# Altium PCB imp_match_v1_1.PcbDoc
Units mil, origin at the board's own origin, x right, y up, seen from the top; angles counter-clockwise.
Board outline 3937.01 x 3937.01 mil, 4 copper layers (Top Layer, Layer 1, Layer 2, Bottom Layer), stack 26.182 mil thick; 15 components, 12 nets, 75 pads, 910 vias.
Unrouted connection lines stored in the file: 23.
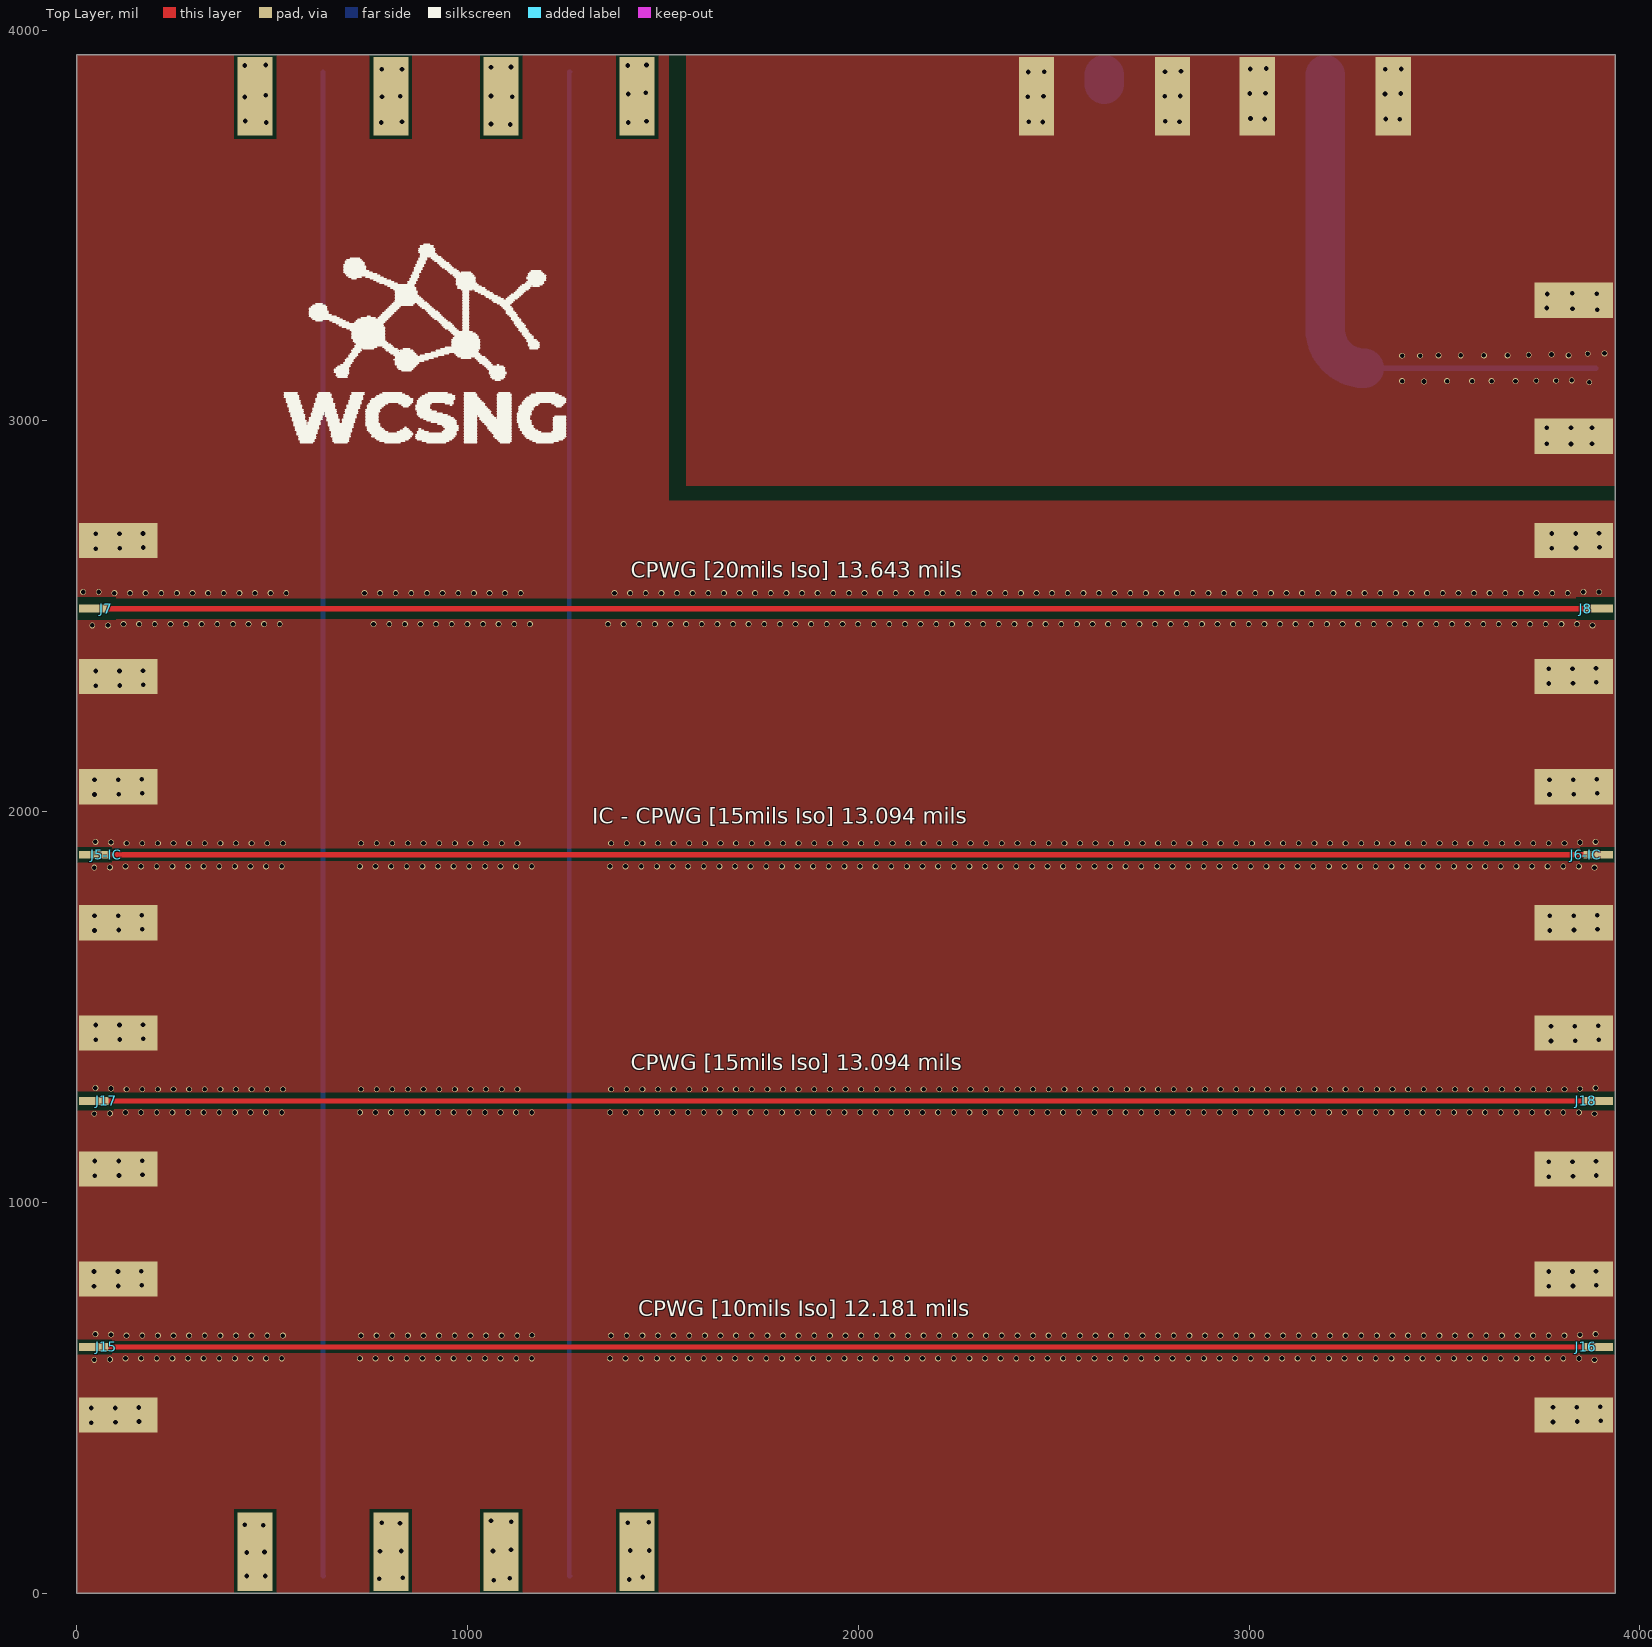
[diagram p0: Top Layer view]
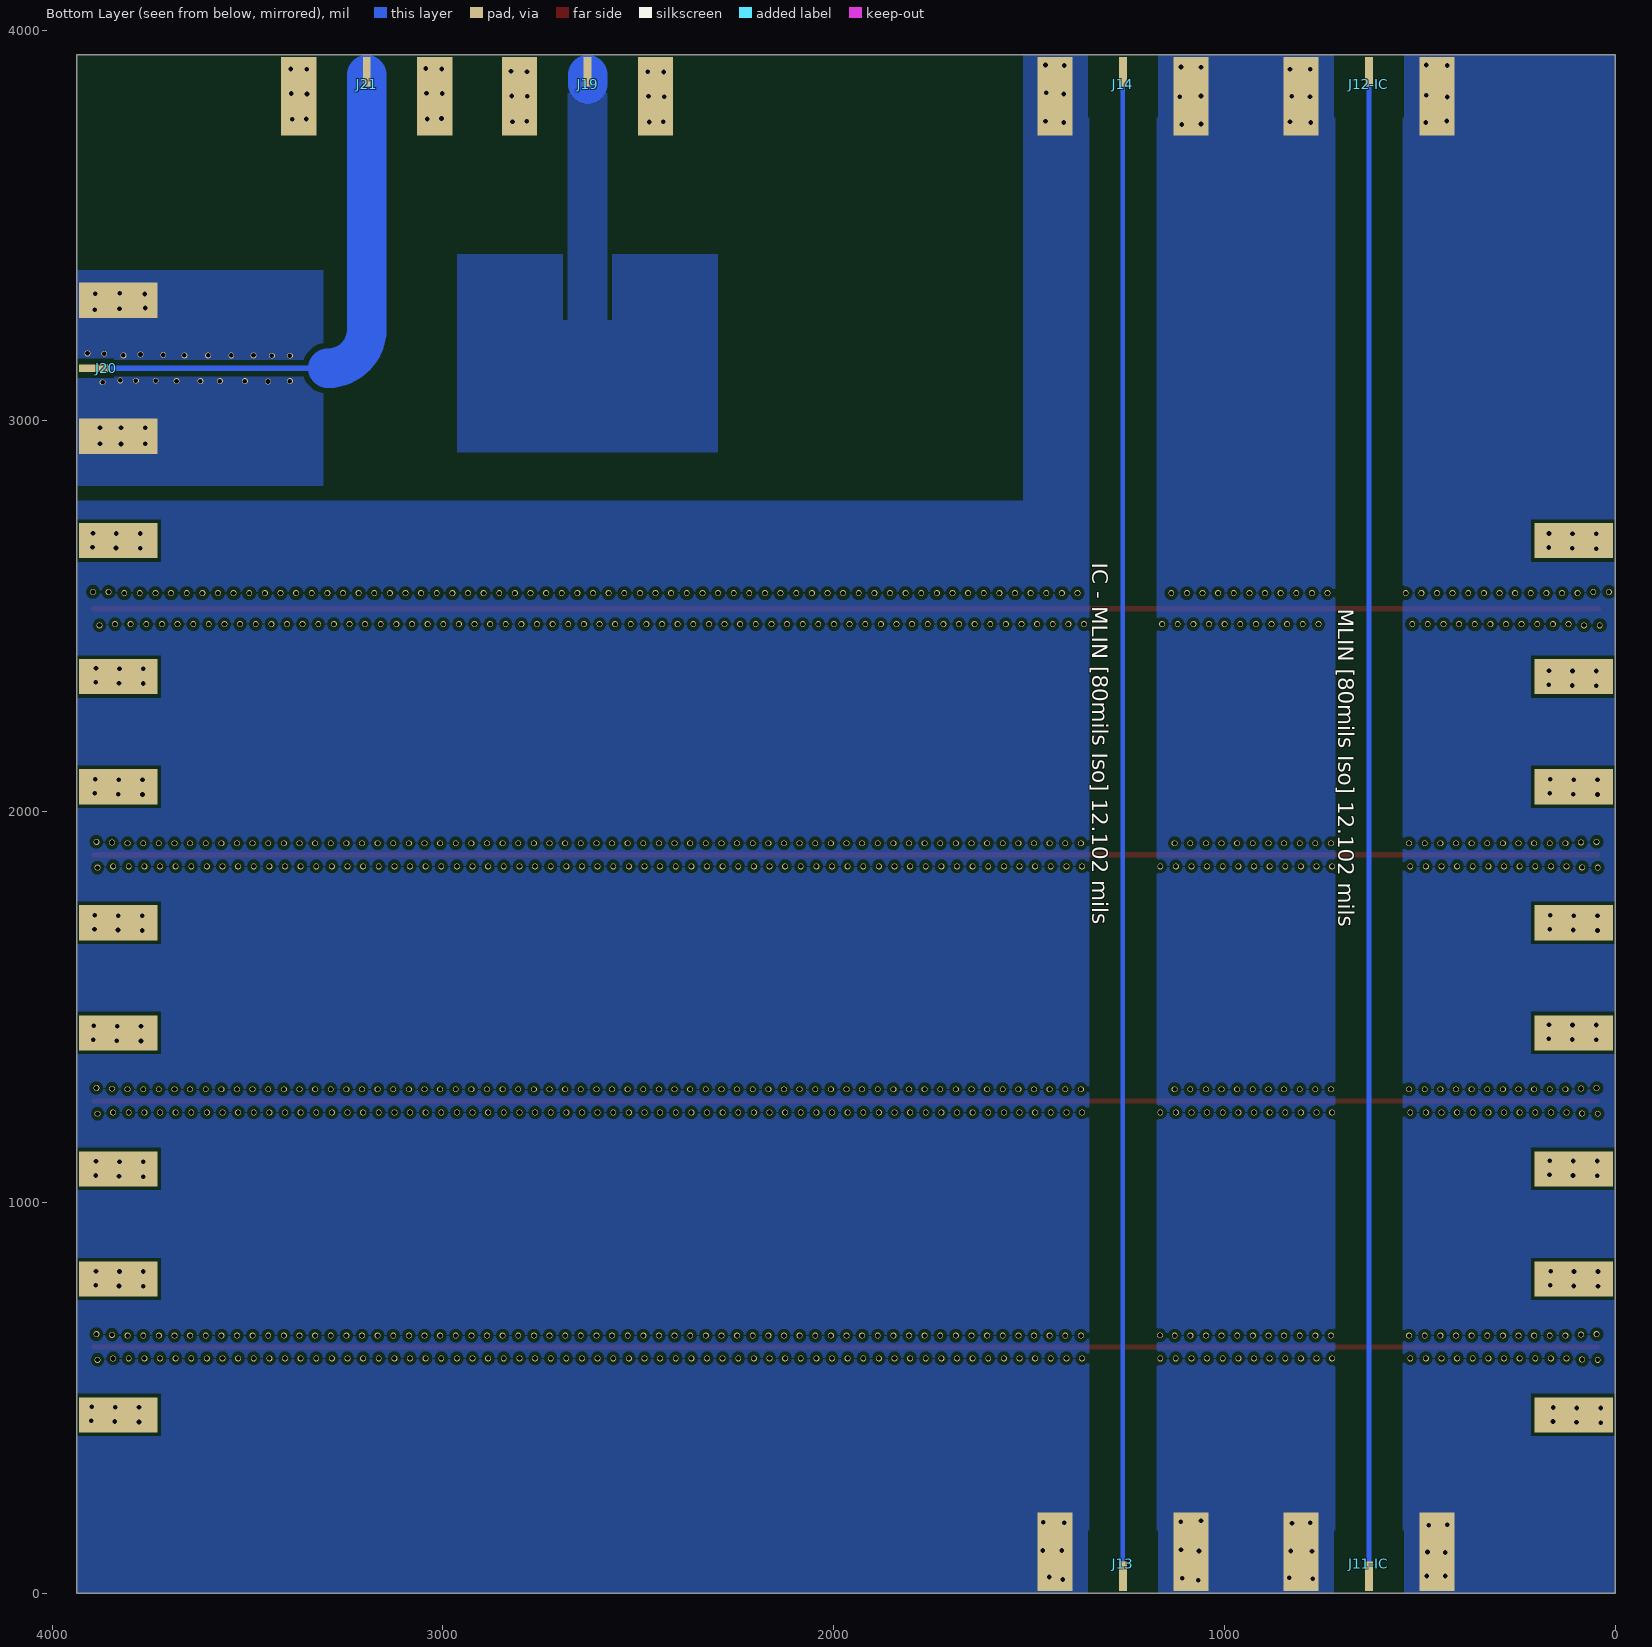
[diagram p1: Bottom Layer view, seen from below]
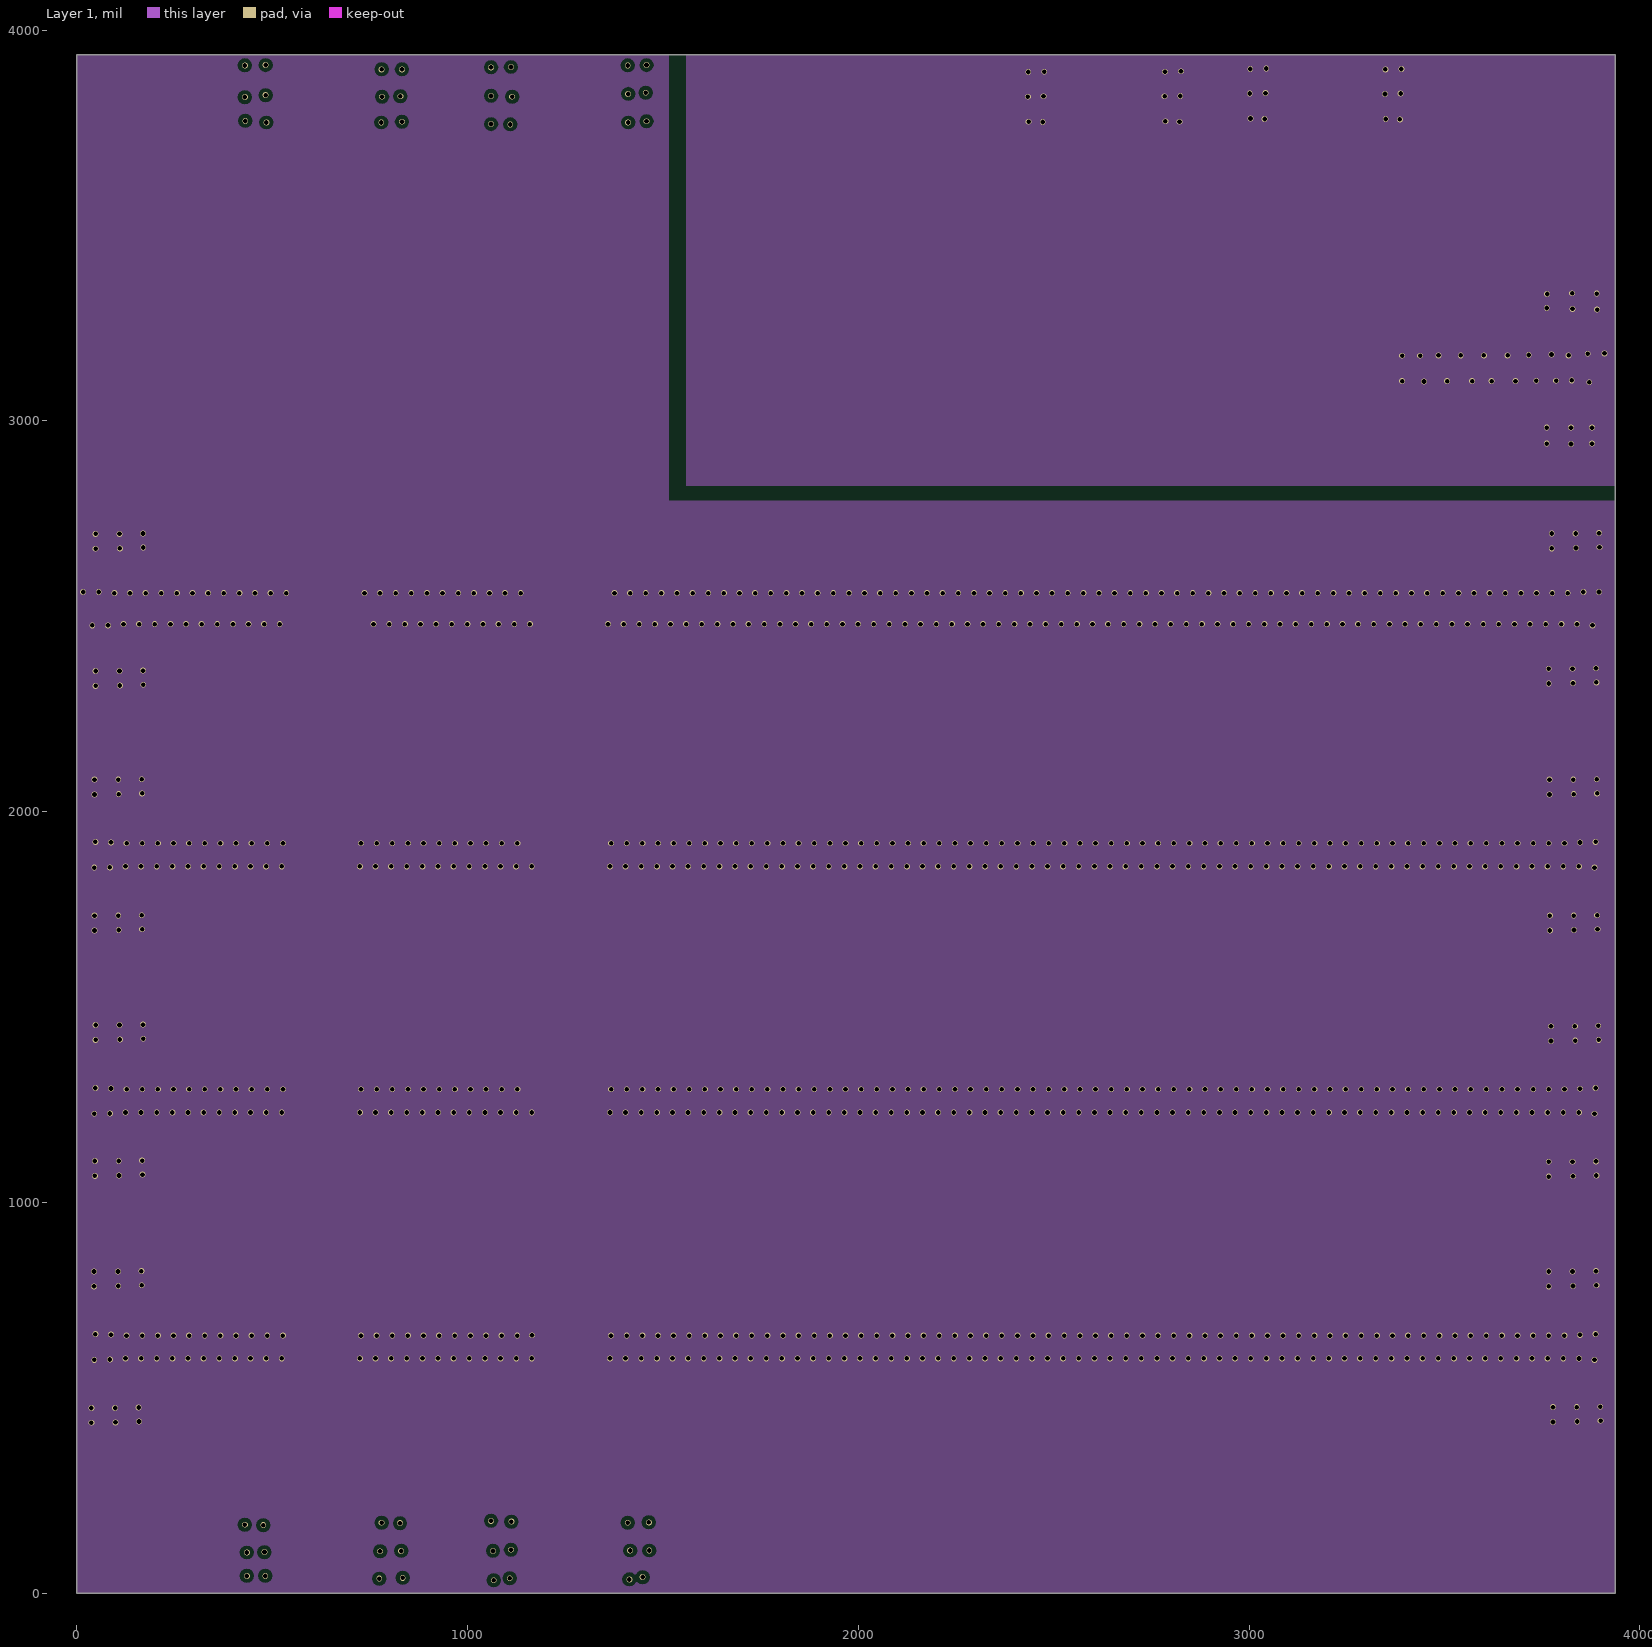
[diagram p2: Layer 1]
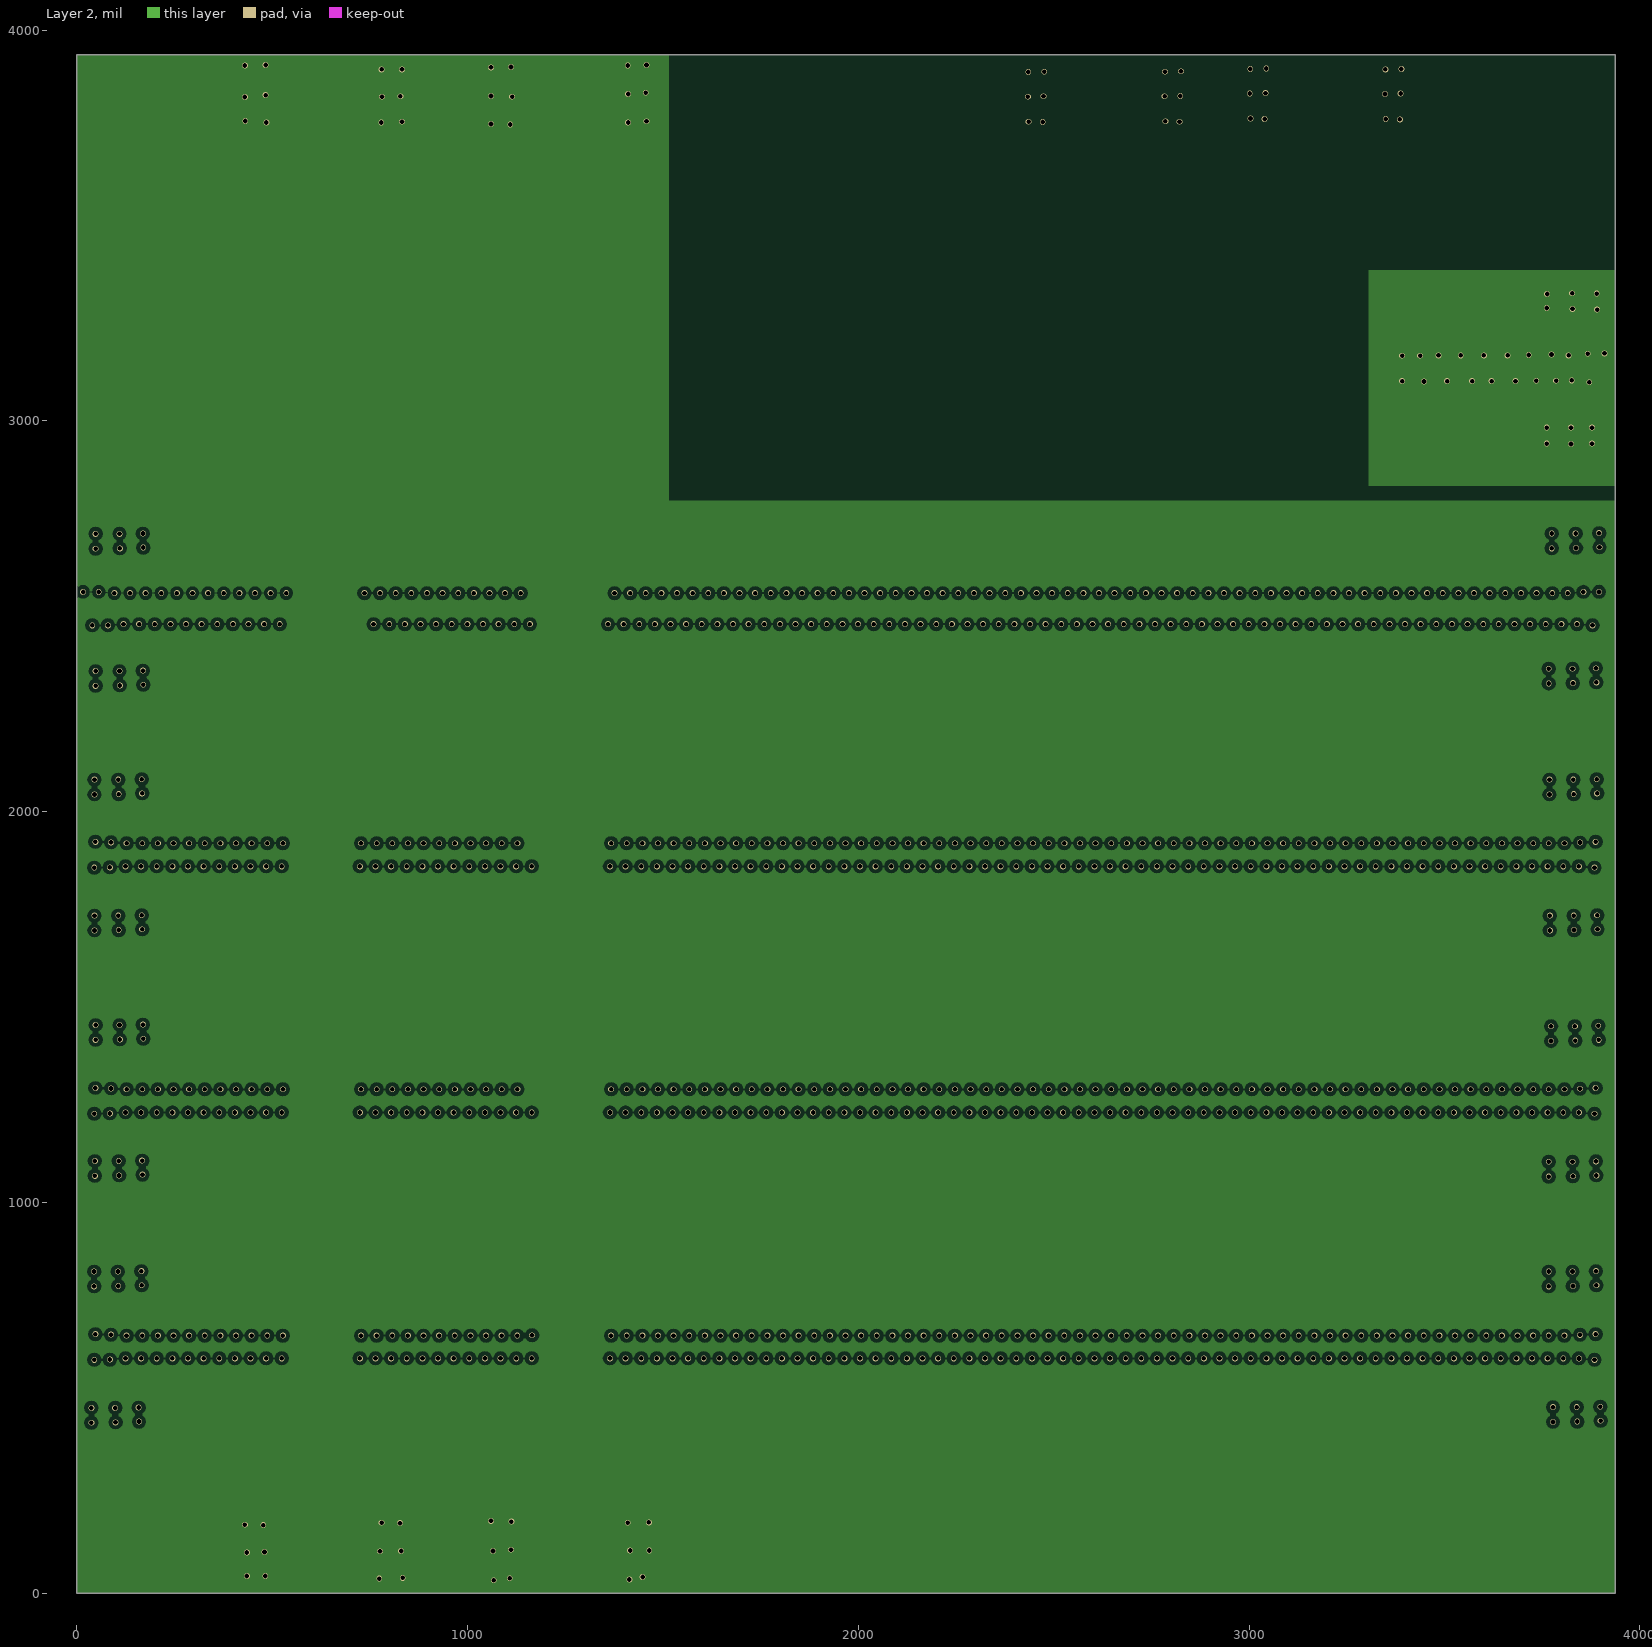
[diagram p3: Layer 2]

## Layer stack, top to bottom
Top Solder: solder mask 0.4, Solder Resist, Dk 3.5
Top Layer: signal copper 1.3779
Prepreg - Top: prepreg 6.89, 7628AT05, Dk 4.2
Layer 1: signal copper 1.3779
Core: dielectric 6.89, FR-4 7628, Dk 4.2
Layer 2: signal copper 1.3779
Prepreg - Bottom: prepreg 6.89, 7628AT05, Dk 4.2
Bottom Layer: signal copper 1.3779
Bottom Solder: solder mask 0.4, Solder Resist, Dk 3.5

## Board outline
0,0 3937.01,0 3937.01,3937.01 0,3937.01

## Design rules (kind name [scope] priority, off if disabled: settings)
Clearance "Schematic Clearance Constraint_8" [InNet('RF8')] p1: gap=15 ignorepadtopadclearanceinfootprint=FALSE except(0: Arc-Hole Track-Hole SMDPad-Hole THPad-Hole Via-Hole Fill-Hole Poly-Hole Region-Hole Text-Hole)
Clearance "Schematic Clearance Constraint_7" [InNet('Patch')] p2: gap=20 ignorepadtopadclearanceinfootprint=FALSE except(0: Arc-Fill Arc-Poly Arc-Region Arc-Hole Track-Fill Track-Poly Track-Region Track-Hole SMDPad-Hole THPad-Hole Via-Hole Fill-Hole Poly-Hole Region-Hole Text-Hole)
Clearance "Schematic Clearance Constraint_6" [InNet('RF7')] p3: gap=80 ignorepadtopadclearanceinfootprint=FALSE except(0: Arc-Hole Track-Hole SMDPad-Hole THPad-Hole Via-Hole Fill-Hole Poly-Hole Region-Hole Text-Hole)
Clearance "Schematic Clearance Constraint_9" [InNet('RF6')] p4: gap=80 ignorepadtopadclearanceinfootprint=FALSE except(0: Arc-Hole Track-Hole SMDPad-Hole THPad-Hole Via-Hole Fill-Hole Poly-Hole Region-Hole Text-Hole)
Clearance "Schematic Clearance Constraint_4" [InNet('RF2')] p5: gap=15 ignorepadtopadclearanceinfootprint=FALSE except(0: Arc-Hole Track-Hole SMDPad-Hole THPad-Hole Via-Hole Fill-Hole Poly-Hole Region-Hole Text-Hole)
Clearance "Schematic Clearance Constraint_2" [InNet('RF1')] p6: gap=10 ignorepadtopadclearanceinfootprint=FALSE except(0: Arc-Hole Track-Hole SMDPad-Hole THPad-Hole Via-Hole Fill-Hole Poly-Hole Region-Hole Text-Hole)
Clearance "Schematic Clearance Constraint_5" [InNet('RF4')] p7: gap=20 ignorepadtopadclearanceinfootprint=FALSE except(0: Arc-Hole Track-Hole SMDPad-Hole THPad-Hole Via-Hole Fill-Hole Poly-Hole Region-Hole Text-Hole)
Clearance "Schematic Clearance Constraint_1" [InNet('RF1')] p8: gap=10 ignorepadtopadclearanceinfootprint=FALSE except(0: Arc-Hole Track-Hole SMDPad-Hole THPad-Hole Via-Hole Fill-Hole Poly-Hole Region-Hole Text-Hole)
Clearance "Schematic Clearance Constraint" [InNet('RF2')] p9: gap=10 ignorepadtopadclearanceinfootprint=FALSE except(0: Arc-Hole Track-Hole SMDPad-Hole THPad-Hole Via-Hole Fill-Hole Poly-Hole Region-Hole Text-Hole)
Clearance [All] p10: gap=10 ignorepadtopadclearanceinfootprint=FALSE except(0: Arc-Hole Track-Hole SMDPad-Hole THPad-Hole Via-Hole Fill-Hole Poly-Hole Region-Hole Text-Hole)
PolygonConnect [All] p1: connectstyle=Direct reliefconductorwidth=10 reliefentries=4 polygonreliefangle="90 Angle" airgapwidth=10
RoutingVias [All] p1: holewidth=12 width=15 viastyle="Through Hole" minholewidth=10 minwidth=12 maxholewidth=30 maxwidth=33
SolderMaskExpansion [All] p1: expansion=4 istentingtop=FALSE
Width "Schematic Width Constraint_4" [InNet('RF3')] p1: maxlimit=13.09 minlimit=10 preferedwidth=13.09 toplayer_minwidth=13.09 midlayer1_maxwidth=10 midlayer1_prefwidth=10 midlayer2_maxwidth=10 midlayer2_prefwidth=10 bottomlayer_minwidth=13.09 minimp=50.000000 maximp=50.000000 favimp=50.000000
Width "Schematic Width Constraint_10" [InNet('RF8')] p2: maxlimit=101 minlimit=10 preferedwidth=13.09 toplayer_minwidth=13.09 midlayer1_maxwidth=10 midlayer1_prefwidth=10 midlayer2_maxwidth=10 midlayer2_prefwidth=10 bottomlayer_minwidth=13.09 minimp=50.000000 maximp=50.000000 favimp=50.000000
Width "Schematic Width Constraint_2" [InNet('RF7')] p3: maxlimit=12.1 minlimit=10 preferedwidth=12.1 toplayer_minwidth=12.1 midlayer1_maxwidth=10 midlayer1_prefwidth=10 midlayer2_maxwidth=10 midlayer2_prefwidth=10 bottomlayer_minwidth=12.1 minimp=50.000000 maximp=50.000000 favimp=50.000000
Width "Schematic Width Constraint_9" [InNet('RF6')] p4: maxlimit=12.1 minlimit=10 preferedwidth=12.1 toplayer_minwidth=12.1 midlayer1_maxwidth=10 midlayer1_prefwidth=10 midlayer2_maxwidth=10 midlayer2_prefwidth=10 bottomlayer_minwidth=12.1 minimp=50.000000 maximp=50.000000 favimp=50.000000
Width "Schematic Width Constraint_6" [InNet('RF2')] p5: maxlimit=13.09 minlimit=10 preferedwidth=13.09 toplayer_minwidth=13.09 midlayer1_maxwidth=10 midlayer1_prefwidth=10 midlayer2_maxwidth=10 midlayer2_prefwidth=10 bottomlayer_minwidth=13.09 minimp=50.000000 maximp=50.000000 favimp=50.000000
Width "Schematic Width Constraint_3" [InNet('RF1')] p6: maxlimit=12.18 minlimit=10 preferedwidth=12.18 toplayer_minwidth=12.18 midlayer1_maxwidth=10 midlayer1_prefwidth=10 midlayer2_maxwidth=10 midlayer2_prefwidth=10 bottomlayer_minwidth=12.18 minimp=50.000000 maximp=50.000000 favimp=50.000000
Width "Schematic Width Constraint_7" [InNet('RF4')] p7: maxlimit=13.64 minlimit=10 preferedwidth=13.64 toplayer_minwidth=13.64 midlayer1_maxwidth=10 midlayer1_prefwidth=10 midlayer2_maxwidth=10 midlayer2_prefwidth=10 bottomlayer_minwidth=13.64 minimp=50.000000 maximp=50.000000 favimp=50.000000
Width "Schematic Width Constraint_1" [InNet('RF2')] p8: maxlimit=12.63 minlimit=12.63 preferedwidth=12.63 midlayer1_minwidth=12.63 midlayer2_minwidth=12.63 bottomlayer_minwidth=12.63 minimp=50.000000 maximp=50.000000 favimp=50.000000
Width "Schematic Width Constraint" [InNet('RF1')] p9: maxlimit=12.02 minlimit=12.02 preferedwidth=12.02 minimp=50.000000 maximp=50.000000 favimp=50.000000
Width [All] p10: maxlimit=120 minlimit=10 preferedwidth=10 toplayer_maxwidth=10 midlayer1_maxwidth=10 midlayer2_maxwidth=10 minimp=50.000000 maximp=50.000000 favimp=50.000000
30 further rules are at their usual default settings.

## Classes and differential pairs
component class imp_match_v1_1: J5-IC J6-IC J7 J11-IC J12-IC J13 J14 J15 J16 J17 J18 J19 J20 J21

## Components (designator, comment, footprint, x,y, rotation, side; value= is the part's Value field where it differs from the comment)
J5-IC "SMA 50 Ohm edge" "SMA-OSHPARK-4L-1.6MM- ALT3" 5,1889.76 r0 top
J6-IC "SMA 50 Ohm edge" "SMA-OSHPARK-4L-1.6MM- ALT3" 3932.01,1889.76 r180 top
J7 "SMA 50 Ohm edge" "SMA-OSHPARK-4L-1.6MM- ALT3" 5,2519.68 r0 top
J8 "SMA 50 Ohm edge" "SMA-OSHPARK-4L-1.6MM- ALT3" 3932.01,2519.68 r180 top
J11-IC "SMA 50 Ohm edge" "SMA-OSHPARK-4L-1.6MM- ALT3" 629.92,5 r90 bottom
J12-IC "SMA 50 Ohm edge" "SMA-OSHPARK-4L-1.6MM- ALT3" 629.92,3932.01 r270 bottom
J13 "SMA 50 Ohm edge" "SMA-OSHPARK-4L-1.6MM- ALT3" 1259.84,5 r90 bottom
J14 "SMA 50 Ohm edge" "SMA-OSHPARK-4L-1.6MM- ALT3" 1259.84,3932.01 r270 bottom
J15 "SMA 50 Ohm edge" "SMA-OSHPARK-4L-1.6MM- ALT3" 5,629.92 r0 top
J16 "SMA 50 Ohm edge" "SMA-OSHPARK-4L-1.6MM- ALT3" 3932.01,629.92 r180 top
J17 "SMA 50 Ohm edge" "SMA-OSHPARK-4L-1.6MM- ALT3" 5,1259.84 r0 top
J18 "SMA 50 Ohm edge" "SMA-OSHPARK-4L-1.6MM- ALT3" 3932.01,1259.84 r180 top
J19 "SMA 50 Ohm edge" "SMA-OSHPARK-4L-1.6MM- ALT3" 2629.98,3932.01 r270 bottom locked
J20 "SMA 50 Ohm edge" "SMA-OSHPARK-4L-1.6MM- ALT3" 3932.01,3135 r180 bottom
J21 "SMA 50 Ohm edge" "SMA-OSHPARK-4L-1.6MM- ALT3" 3195,3932.01 r270 bottom locked

## Footprints (in the part's own frame and the unit in brackets; to place one, negate y for a bottom-side part, rotate by r counter-clockwise, add the part's x,y. Pads: shape width x height; smd on the part's side, far side on the other; paste and mask are expansions set on the pad)
"SMA-OSHPARK-4L-1.6MM- ALT3" [mil] "Short and thin signal pin"
  rect 200x90 smd: GND(101,-174) GND(101,174)
  rect 200x90 smd far side: GND(101,-174) GND(101,174)
  rect 75x20 smd: SIG(38.5,0)

## Part data
J5-IC J6-IC J7 J8 J11-IC J12-IC J13 J14 J15 J16 J17 J18 J19 J20 J21: library part SMA-OSHPARK-4L-1.6MM-ALT3, Package=SMA-OSHPARK-4L-1.6MM, Supplier Part Number 1=J658-ND, DeviceName=-OSHPARK-4L-1.6MM, DeviceSetName=SMA, GateName_1=G1, LibraryName=dword1511-connectors, Supplier 1=Digi-Key, SymbolName_1=COAX

## Via types
v1: diameter 15, hole 12, Top Layer to Bottom Layer, 910 vias

## Nets (pads, with @x,y where several pads share a name; then routed paths per layer and width w, separated by ;. In a path a pad name is that pad's centre, name@x,y a point inside that pad or via, vN(x,y) a via of type N, cw(c..) or ccw(c..) an arc to the next point about the centre after c; other vN are vias at no path point)
GND: 
GND1: J5-IC.GND J6-IC.GND J7.GND J8.GND J15.GND J16.GND J17.GND J18.GND
  other v1: 37,436 99,437 3778,438 159,439 3840,439 3900,441 37,474 98,474 158,475 3778,476 3839,476 3899,477 44.48,596.98 3884.19,596.98 84.48,597.67 124.36,600.77 164.36,600.77 204.36,600.77 244.36,600.77 284.36,600.77 324.36,600.77 364.36,600.77 404.36,600.77 444.36,600.77 484.36,600.77 524.36,600.77 724.36,600.77 764.36,600.77 804.36,600.77 844.36,600.77 884.36,600.77 924.36,600.77 964.36,600.77 1004.36,600.77 1044.36,600.77 1084.36,600.77 1124.36,600.77 1164.36,600.77 1364.36,600.77 1404.36,600.77 1444.36,600.77 1484.36,600.77 1524.36,600.77 1564.36,600.77 1604.36,600.77 1644.36,600.77 1684.36,600.77 1724.36,600.77 1764.36,600.77 1804.36,600.77 1844.36,600.77 1884.36,600.77 1924.36,600.77 1964.36,600.77 2004.36,600.77 2044.36,600.77 2084.36,600.77 2124.36,600.77 2164.36,600.77 2204.36,600.77 2244.36,600.77 2284.36,600.77 2324.36,600.77 2364.36,600.77 2404.36,600.77 2444.36,600.77 2484.36,600.77 2524.36,600.77 2564.36,600.77 2604.36,600.77 2644.36,600.77 2684.36,600.77 2724.36,600.77 2764.36,600.77 2804.36,600.77 2844.36,600.77 2884.36,600.77 2924.36,600.77 2964.36,600.77 3004.36,600.77 3044.36,600.77 3084.36,600.77 3124.36,600.77 3164.36,600.77 3204.36,600.77 3244.36,600.77 3284.36,600.77 3324.36,600.77 3364.36,600.77 3404.36,600.77 3444.36,600.77 3484.36,600.77 3524.36,600.77 3564.36,600.77 3604.36,600.77 3644.36,600.77 3684.36,600.77 3724.36,600.77 3764.36,600.77 3804.36,600.77 3844.36,600.65 127.22,659.07 167.22,659.07 207.22,659.07 247.22,659.07 287.22,659.07 327.22,659.07 367.22,659.07 407.22,659.07 447.22,659.07 487.22,659.07 527.22,659.07 727.22,659.07 767.22,659.07 807.22,659.07 847.22,659.07 887.22,659.07 927.22,659.07 967.22,659.07 1007.22,659.07 1047.22,659.07 1087.22,659.07 1127.22,659.07 1367.22,659.07 1407.22,659.07 1447.22,659.07 1487.22,659.07 1527.22,659.07 1567.22,659.07 1607.22,659.07 1647.22,659.07 1687.22,659.07 1727.22,659.07 1767.22,659.07 1807.22,659.07 1847.22,659.07 1887.22,659.07 1927.22,659.07 1967.22,659.07 2007.22,659.07 2047.22,659.07 2087.22,659.07 2127.22,659.07 2167.22,659.07 2207.22,659.07 2247.22,659.07 2287.22,659.07 2327.22,659.07 2367.22,659.07 2407.22,659.07 2447.22,659.07 2487.22,659.07 2527.22,659.07 2567.22,659.07 2607.22,659.07 2647.22,659.07 2687.22,659.07 2727.22,659.07 2767.22,659.07 2807.22,659.07 2847.22,659.07 2887.22,659.07 2927.22,659.07 2967.22,659.07 3007.22,659.07 3047.22,659.07 3087.22,659.07 3127.22,659.07 3167.22,659.07 3207.22,659.07 3247.22,659.07 3287.22,659.07 3327.22,659.07 3367.22,659.07 3407.22,659.07 3447.22,659.07 3487.22,659.07 3527.22,659.07 3567.22,659.07 3607.22,659.07 3647.22,659.07 3687.22,659.07 3727.22,659.07 3767.22,659.07 3807.22,659.07 1165,660 3847.17,661.08 87.3,661.61 47.32,662.86 3887.13,662.86 44,785 3767,785 106,786 3829,786 166,788 3889,788 44,823 105,823 3767,823 3828,823 165,824 3888,824 3767,1066 3829,1067 46,1068 108,1069 3889,1069 168,1071 3767,1104 3828,1104 3888,1105 46,1106 107,1106 167,1107 44.42,1226.9 3884.19,1226.9 84.41,1227.58 124.33,1230.23 164.33,1230.23 204.33,1230.23 244.33,1230.23 284.33,1230.23 324.33,1230.23 364.33,1230.23 404.33,1230.23 444.33,1230.23 484.33,1230.23 524.33,1230.23 724.33,1230.23 764.33,1230.23 804.33,1230.23 844.33,1230.23 884.33,1230.23 924.33,1230.23 964.33,1230.23 1004.33,1230.23 1044.33,1230.23 1084.33,1230.23 1124.33,1230.23 1164.33,1230.23 1364.33,1230.23 1404.33,1230.23 1444.33,1230.23 1484.33,1230.23 1524.33,1230.23 1564.33,1230.23 1604.33,1230.23 1644.33,1230.23 1684.33,1230.23 1724.33,1230.23 1764.33,1230.23 1804.33,1230.23 1844.33,1230.23 1884.33,1230.23 1924.33,1230.23 1964.33,1230.23 2004.33,1230.23 2044.33,1230.23 2084.33,1230.23 2124.33,1230.23 2164.33,1230.23 2204.33,1230.23 2244.33,1230.23 2284.33,1230.23 2324.33,1230.23 2364.33,1230.23 2404.33,1230.23 2444.33,1230.23 2484.33,1230.23 2524.33,1230.23 2564.33,1230.23 2604.33,1230.23 2644.33,1230.23 2684.33,1230.23 2724.33,1230.23 2764.33,1230.23 2804.33,1230.23 2844.33,1230.23 2884.33,1230.23 2924.33,1230.23 2964.33,1230.23 3004.33,1230.23 3044.33,1230.23 3084.33,1230.23 3124.33,1230.23 3164.33,1230.23 3204.33,1230.23 3244.33,1230.23 3284.33,1230.23 3324.33,1230.23 3364.33,1230.23 3404.33,1230.23 3444.33,1230.23 3484.33,1230.23 3524.33,1230.23 3564.33,1230.23 3604.33,1230.23 3644.33,1230.23 3684.33,1230.23 3724.33,1230.23 3764.33,1230.23 3804.33,1230.23 3844.33,1230.23 127.32,1289.46 167.32,1289.46 207.32,1289.46 247.32,1289.46 287.32,1289.46 327.32,1289.46 367.32,1289.46 407.32,1289.46 447.32,1289.46 487.32,1289.46 527.32,1289.46 727.32,1289.46 767.32,1289.46 807.32,1289.46 847.32,1289.46 887.32,1289.46 927.32,1289.46 967.32,1289.46 1007.32,1289.46 1047.32,1289.46 1087.32,1289.46 1127.32,1289.46 1367.32,1289.46 1407.32,1289.46 1447.32,1289.46 1487.32,1289.46 1527.32,1289.46 1567.32,1289.46 1607.32,1289.46 1647.32,1289.46 1687.32,1289.46 1727.32,1289.46 1767.32,1289.46 1807.32,1289.46 1847.32,1289.46 1887.32,1289.46 1927.32,1289.46 1967.32,1289.46 2007.32,1289.46 2047.32,1289.46 2087.32,1289.46 2127.32,1289.46 2167.32,1289.46 2207.32,1289.46 2247.32,1289.46 2287.32,1289.46 2327.32,1289.46 2367.32,1289.46 2407.32,1289.46 2447.32,1289.46 2487.32,1289.46 2527.32,1289.46 2567.32,1289.46 2607.32,1289.46 2647.32,1289.46 2687.32,1289.46 2727.32,1289.46 2767.32,1289.46 2807.32,1289.46 2847.32,1289.46 2887.32,1289.46 2927.32,1289.46 2967.32,1289.46 3007.32,1289.46 3047.32,1289.46 3087.32,1289.46 3127.32,1289.46 3167.32,1289.46 3207.32,1289.46 3247.32,1289.46 3287.32,1289.46 3327.32,1289.46 3367.32,1289.46 3407.32,1289.46 3447.32,1289.46 3487.32,1289.46 3527.32,1289.46 3567.32,1289.46 3607.32,1289.46 3647.32,1289.46 3687.32,1289.46 3727.32,1289.46 3767.32,1289.46 3807.32,1289.46 3847.29,1291.05 87.37,1291.52 47.39,1292.78 3887.25,1292.78 3773,1413 3835,1414 48,1416 3895,1416 110,1417 170,1419 3773,1451 3834,1451 3894,1452 48,1454 109,1454 169,1455 45,1696 3770,1696 107,1697 3832,1697 167,1699 3892,1699 45,1734 106,1734 3770,1734 3831,1734 166,1735 3891,1735 44.42,1856.82 3884.19,1856.82 84.41,1857.5 124.33,1860.15 164.33,1860.15 204.33,1860.15 244.33,1860.15 284.33,1860.15 324.33,1860.15 364.33,1860.15 404.33,1860.15 444.33,1860.15 484.33,1860.15 524.33,1860.15 724.33,1860.15 764.33,1860.15 804.33,1860.15 844.33,1860.15 884.33,1860.15 924.33,1860.15 964.33,1860.15 1004.33,1860.15 1044.33,1860.15 1084.33,1860.15 1124.33,1860.15 1164.33,1860.15 1364.33,1860.15 1404.33,1860.15 1444.33,1860.15 1484.33,1860.15 1524.33,1860.15 1564.33,1860.15 1604.33,1860.15 1644.33,1860.15 1684.33,1860.15 1724.33,1860.15 1764.33,1860.15 1804.33,1860.15 1844.33,1860.15 1884.33,1860.15 1924.33,1860.15 1964.33,1860.15 2004.33,1860.15 2044.33,1860.15 2084.33,1860.15 2124.33,1860.15 2164.33,1860.15 2204.33,1860.15 2244.33,1860.15 2284.33,1860.15 2324.33,1860.15 2364.33,1860.15 2404.33,1860.15 2444.33,1860.15 2484.33,1860.15 2524.33,1860.15 2564.33,1860.15 2604.33,1860.15 2644.33,1860.15 2684.33,1860.15 2724.33,1860.15 2764.33,1860.15 2804.33,1860.15 2844.33,1860.15 2884.33,1860.15 2924.33,1860.15 2964.33,1860.15 3004.33,1860.15 3044.33,1860.15 3084.33,1860.15 3124.33,1860.15 3164.33,1860.15 3204.33,1860.15 3244.33,1860.15 3284.33,1860.15 3324.33,1860.15 3364.33,1860.15 3404.33,1860.15 3444.33,1860.15 3484.33,1860.15 3524.33,1860.15 3564.33,1860.15 3604.33,1860.15 3644.33,1860.15 3684.33,1860.15 3724.33,1860.15 3764.33,1860.15 3804.33,1860.15 3844.33,1860.15 127.32,1919.38 167.32,1919.38 207.32,1919.38 247.32,1919.38 287.32,1919.38 327.32,1919.38 367.32,1919.38 407.32,1919.38 447.32,1919.38 487.32,1919.38 527.32,1919.38 727.32,1919.38 767.32,1919.38 807.32,1919.38 847.32,1919.38 887.32,1919.38 927.32,1919.38 967.32,1919.38 1007.32,1919.38 1047.32,1919.38 1087.32,1919.38 1127.32,1919.38 1367.32,1919.38 1407.32,1919.38 1447.32,1919.38 1487.32,1919.38 1527.32,1919.38 1567.32,1919.38 1607.32,1919.38 1647.32,1919.38 1687.32,1919.38 1727.32,1919.38 1767.32,1919.38 1807.32,1919.38 1847.32,1919.38 1887.32,1919.38 1927.32,1919.38 1967.32,1919.38 2007.32,1919.38 2047.32,1919.38 2087.32,1919.38 2127.32,1919.38 2167.32,1919.38 2207.32,1919.38 2247.32,1919.38 2287.32,1919.38 2327.32,1919.38 2367.32,1919.38 2407.32,1919.38 2447.32,1919.38 2487.32,1919.38 2527.32,1919.38 2567.32,1919.38 2607.32,1919.38 2647.32,1919.38 2687.32,1919.38 2727.32,1919.38 2767.32,1919.38 2807.32,1919.38 2847.32,1919.38 2887.32,1919.38 2927.32,1919.38 2967.32,1919.38 3007.32,1919.38 3047.32,1919.38 3087.32,1919.38 3127.32,1919.38 3167.32,1919.38 3207.32,1919.38 3247.32,1919.38 3287.32,1919.38 3327.32,1919.38 3367.32,1919.38 3407.32,1919.38 3447.32,1919.38 3487.32,1919.38 3527.32,1919.38 3567.32,1919.38 3607.32,1919.38 3647.32,1919.38 3687.32,1919.38 3727.32,1919.38 3767.32,1919.38 3807.32,1919.38 87.37,1921.44 3847.29,1920.97 47.39,1922.7 3887.25,1922.7 45,2044 3769,2044 107,2045 3831,2045 167,2047 3891,2047 45,2082 106,2082 3769,2082 3830,2082 166,2083 3890,2083 48,2322 110,2323 170,2325 3767,2328 3829,2329 3889,2331 48,2360 109,2360 169,2361 3767,2366 3828,2366 3888,2367 39.48,2476.9 79.48,2476.9 3879.25,2476.9 119.36,2479.95 159.36,2479.95 199.36,2479.95 239.36,2479.95 279.36,2479.95 319.36,2479.95 359.36,2479.95 399.36,2479.95 439.36,2479.95 479.36,2479.95 519.36,2479.95 759.36,2479.95 799.36,2479.95 839.36,2479.95 879.36,2479.95 919.36,2479.95 959.36,2479.95 999.36,2479.95 1039.36,2479.95 1079.36,2479.95 1119.36,2479.95 1159.36,2479.95 1359.36,2479.95 1399.36,2479.95 1439.36,2479.95 1479.36,2479.95 1519.36,2479.95 1559.36,2479.95 1599.36,2479.95 1639.36,2479.95 1679.36,2479.95 1719.36,2479.95 1759.36,2479.95 1799.36,2479.95 1839.36,2479.95 1879.36,2479.95 1919.36,2479.95 1959.36,2479.95 1999.36,2479.95 2039.36,2479.95 2079.36,2479.95 2119.36,2479.95 2159.36,2479.95 2199.36,2479.95 2239.36,2479.95 2279.36,2479.95 2319.36,2479.95 2359.36,2479.95 2399.36,2479.95 2439.36,2479.95 2479.36,2479.95 2519.36,2479.95 2559.36,2479.95 2599.36,2479.95 2639.36,2479.95 2679.36,2479.95 2719.36,2479.95 2759.36,2479.95 2799.36,2479.95 2839.36,2479.95 2879.36,2479.95 2919.36,2479.95 2959.36,2479.95 2999.36,2479.95 3039.36,2479.95 3079.36,2479.95 3119.36,2479.95 3159.36,2479.95 3199.36,2479.95 3239.36,2479.95 3279.36,2479.95 3319.36,2479.95 3359.36,2479.95 3399.36,2479.95 3439.36,2479.95 3479.36,2479.95 3519.36,2479.95 3559.36,2479.95 3599.36,2479.95 3639.36,2479.95 3679.36,2479.95 3719.36,2479.95 3759.36,2479.95 3799.36,2479.95 3839.36,2479.95 95.96,2559.42 135.96,2559.42 175.96,2559.42 215.96,2559.42 255.96,2559.42 295.96,2559.42 335.96,2559.42 375.96,2559.42 415.96,2559.42 455.96,2559.42 495.96,2559.42 535.96,2559.42 735.96,2559.42 775.96,2559.42 815.96,2559.42 855.96,2559.42 895.96,2559.42 935.96,2559.42 975.96,2559.42 1015.96,2559.42 1055.96,2559.42 1095.96,2559.42 1135.96,2559.42 1375.96,2559.42 1415.96,2559.42 1455.96,2559.42 1495.96,2559.42 1535.96,2559.42 1575.96,2559.42 1615.96,2559.42 1655.96,2559.42 1695.96,2559.42 1735.96,2559.42 1775.96,2559.42 1815.96,2559.42 1855.96,2559.42 1895.96,2559.42 1935.96,2559.42 1975.96,2559.42 2015.96,2559.42 2055.96,2559.42 2095.96,2559.42 2135.96,2559.42 2175.96,2559.42 2215.96,2559.42 2255.96,2559.42 2295.96,2559.42 2335.96,2559.42 2375.96,2559.42 2415.96,2559.42 2455.96,2559.42 2495.96,2559.42 2535.96,2559.42 2575.96,2559.42 2615.96,2559.42 2655.96,2559.42 2695.96,2559.42 2735.96,2559.42 2775.96,2559.42 2815.96,2559.42 2855.96,2559.42 2895.96,2559.42 2935.96,2559.42 2975.96,2559.42 3015.96,2559.42 3055.96,2559.42 3095.96,2559.42 3135.96,2559.42 3175.96,2559.42 3215.96,2559.42 3255.96,2559.42 3295.96,2559.42 3335.96,2559.42 3375.96,2559.42 3415.96,2559.42 3455.96,2559.42 3495.96,2559.42 3535.96,2559.42 3575.96,2559.42 3615.96,2559.42 3655.96,2559.42 3695.96,2559.42 3735.96,2559.42 3775.96,2559.42 3815.96,2559.42 16.07,2562.47 56.07,2562.47 3855.84,2562.44 3895.84,2562.47 48,2673 110,2674 3775,2674 3837,2675 170,2676 3897,2677 48,2711 109,2711 169,2712 3775,2712 3836,2712 3896,2713
GND2: J11-IC.GND J12-IC.GND J13.GND J14.GND
  other v1: 1067,33 1414,35 774,37 1108,38 834,39 1448,41 435,44 482,44 435,104 480,105 776,107 830,108 1065,108 1416,109 1465,109 1111,111 477,174 430,175 827,179 780,180 1410,180 1464,181 1112,183 1060,185 1109,3759 1060,3760 485,3764 779,3764 1411,3764 832,3766 1458,3767 431,3768 430,3829 781,3830 1114,3830 828,3831 1060,3832 483,3834 1411,3837 1456,3840 780,3900 832,3900 1060,3905 1111,3906 430,3910 1410,3910 483,3911 1458,3911
GND3: J19.GND J20.GND J21.GND
  other v1: 3824,2941 3762,2942 3878,2942 3762,2983 3824,2983 3878,2983 3871,3099 3448,3101 3392,3102 3507,3102 3571,3102 3621,3102 3682,3102 3735,3103 3786,3103 3826,3104 3392,3167 3438,3167 3485,3168 3542,3168 3601,3168 3662,3168 3818,3168 3716,3169 3774,3170 3867,3172 3910,3173 3891,3285 3828,3287 3762,3289 3763,3325 3890,3326 3827,3327 2472,3765 2436,3766 2822,3766 2786,3767 3386,3772 3040,3773 3350,3773 3004,3774 2434,3830 2474,3831 2784,3831 2824,3832 3348,3837 3002,3838 3388,3838 3042,3839 2435,3893 2476,3894 2785,3894 2826,3895 3349,3900 3003,3901 3390,3901 3044,3902
Patch: J19.SIG | length 25
  Bottom Layer w101: J19.SIG@2629.98,3861.51 J19.SIG@2629.98,3886.51
RF1: J15.SIG J16.SIG | length 3850
  Top Layer w12.18: J15.SIG J16.SIG
RF2: J17.SIG J18.SIG | length 3850
  Top Layer w13.09: J17.SIG J18.SIG
RF3: J5-IC.SIG J6-IC.SIG | length 3850
  Top Layer w13.09: J5-IC.SIG J6-IC.SIG
RF4: J7.SIG J8.SIG | length 3850
  Top Layer w13.64: J7.SIG J8.SIG
RF6: J11-IC.SIG J12-IC.SIG | length 3851.4
  Bottom Layer w12.1: J11-IC.SIG J12-IC.SIG
  Bottom Layer w12.99: J11-IC.SIG J11-IC.SIG@631.32,43.5
RF7: J13.SIG J14.SIG | length 3854.3
  Bottom Layer w12.1: J13.SIG@1262,43.5 J13.SIG J14.SIG J14.SIG@1262,3893.51
RF8: J20.SIG J21.SIG | length 1401.6
  Bottom Layer w13.09: 3295,3135 J20.SIG@3888.51,3135
  Bottom Layer w101: J21.SIG@3195,3886.01 3195,3235 ccw(c3295,3235) 3295,3135

## Polygon pours and split planes (outlines as drawn)
Patch on Bottom Layer "Bottom-PatchAnt" (solid, pour order 20): 2297.07,2920 2962.93,2920 2962.93,3427.11 2693.11,3427.11 2693.11,3258.07 2680.48,3258.07 2680.48,3858.27 2579.48,3858.27 2579.48,3258.07 2566.89,3258.07 2566.89,3427.11 2297.07,3427.11
GND2 on Bottom Layer "GND2-Bottom" (solid, pour order 40): 0,3937 0,-0.01 3937.01,-0.01 3937.01,2795.27 1515,2795.27 1515,3937
GND3 on Bottom Layer "GND3-Bottom" (solid, pour order 52): 3307.09,3385.83 3307.09,2834.65 3937.01,2834.65 3937.01,3385.83
GND1 on Top Layer "GND1-Top" (solid, pour order 34): 0,3937.01 0,0 3937.01,0 3937.01,2795.28 1515,2795.28 1515,3937.01
GND3 on Top Layer "GND3-Top" (solid, pour order 42): 1560,3937.01 1560,2834.65 3937.01,2834.65 3937.01,3937.01
GND1 on Layer 1 "GND1-Mid1" (solid, pour order 36): 0,3937.01 0,0 3937.01,0 3937.01,2795.28 1515,2795.28 1515,3937.01
GND3 on Layer 1 "GND3-Mid1" (solid, pour order 44): 1560,3937.01 1560,2834.65 3937.01,2834.65 3937.01,3937.01
GND2 on Layer 2 "GND2-Mid2" (solid, pour order 38): 0,3937.01 0,0 3937.01,0 3937.01,2795.28 1515,2795.28 1515,3937.01
GND3 on Layer 2 "GND3-Mid2" (solid, pour order 46): 3307.09,3385.83 3307.09,2834.65 3937.01,2834.65 3937.01,3385.83
no net on Bottom Solder "PatchAnt-Mask" (solid, pour order 54): 2297,2920 2962.85,2920 2962.85,3427.11 2693.03,3427.11 2693.03,3258.07 2680.41,3258.07 2680.41,3858.27 2579.41,3858.27 2579.41,3258.07 2566.82,3258.07 2566.82,3427.11 2297,3427.11

## Other copper
Layer 1:
  pour cut-out: 2261,3541

## Silkscreen, mask and mechanical layers (free items; w line width, h text height)
Top Overlay:
  drawing of 588 lines, arcs and shapes, not listed
  text "CPWG [20mils Iso] 13.643 mils" at 1417.32,2598.43 h40
  text "IC - CPWG [15mils Iso] 13.094 mils" at 1318.9,1968.5 h40
  text "CPWG [15mils Iso] 13.094 mils" at 1417.32,1338.58 h40
  text "CPWG [10mils Iso] 12.181 mils" at 1437.01,708.66 h40
Bottom Overlay:
  text "IC - MLIN [80mils Iso] 12.102 mils" at 1338.58,2637.8 h40 r90
  text "MLIN [80mils Iso] 12.102 mils" at 708.66,2519.68 h40 r90
Top Solder:
  lines w12.18: 43.5,629.92 3878,630.39
  lines w13.09: 43.5,1259.84 3884,1260.24 ; 43.5,1889.76 3893.51,1889.76
  lines w13.64: 43.5,2519.68 3893.51,2519.68
Bottom Solder:
  lines w12.1: 629.92,43.5 629.92,3893.51 ; 1259.84,43.5 1259.84,3893.51
  lines w13.09: 3295,3135 3893.51,3135
  lines w101: 2629.98,3831.27 2629.98,3886.51 ; 3195,3886.01 3195,3235 ccw(c3295,3235) 3295,3135
Board Outline:
  the board outline again, w20